# Altium PCB #S and 6s.PcbDoc
Units mil, origin at the board's own origin, x right, y up, seen from the top; angles counter-clockwise.
Board outline 3935 x 7680 mil, 2 copper layers (Top Layer, Bottom Layer); 64 components, 33 nets, 158 pads, 6 vias.
Unrouted connection lines stored in the file: 46.
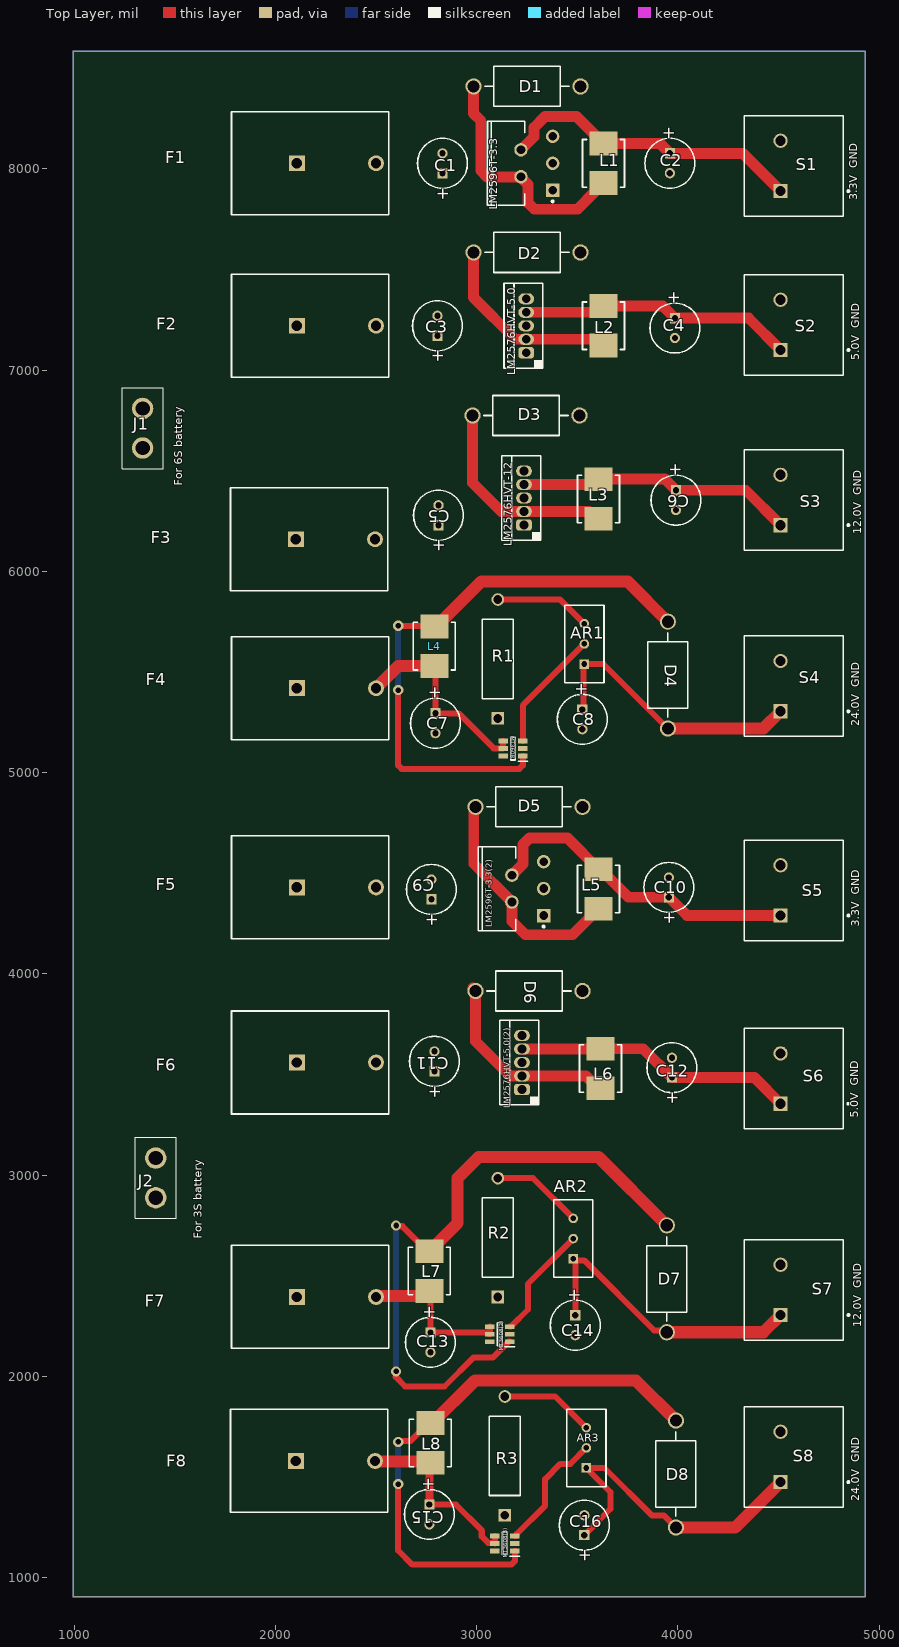
[diagram p0: Top Layer view]
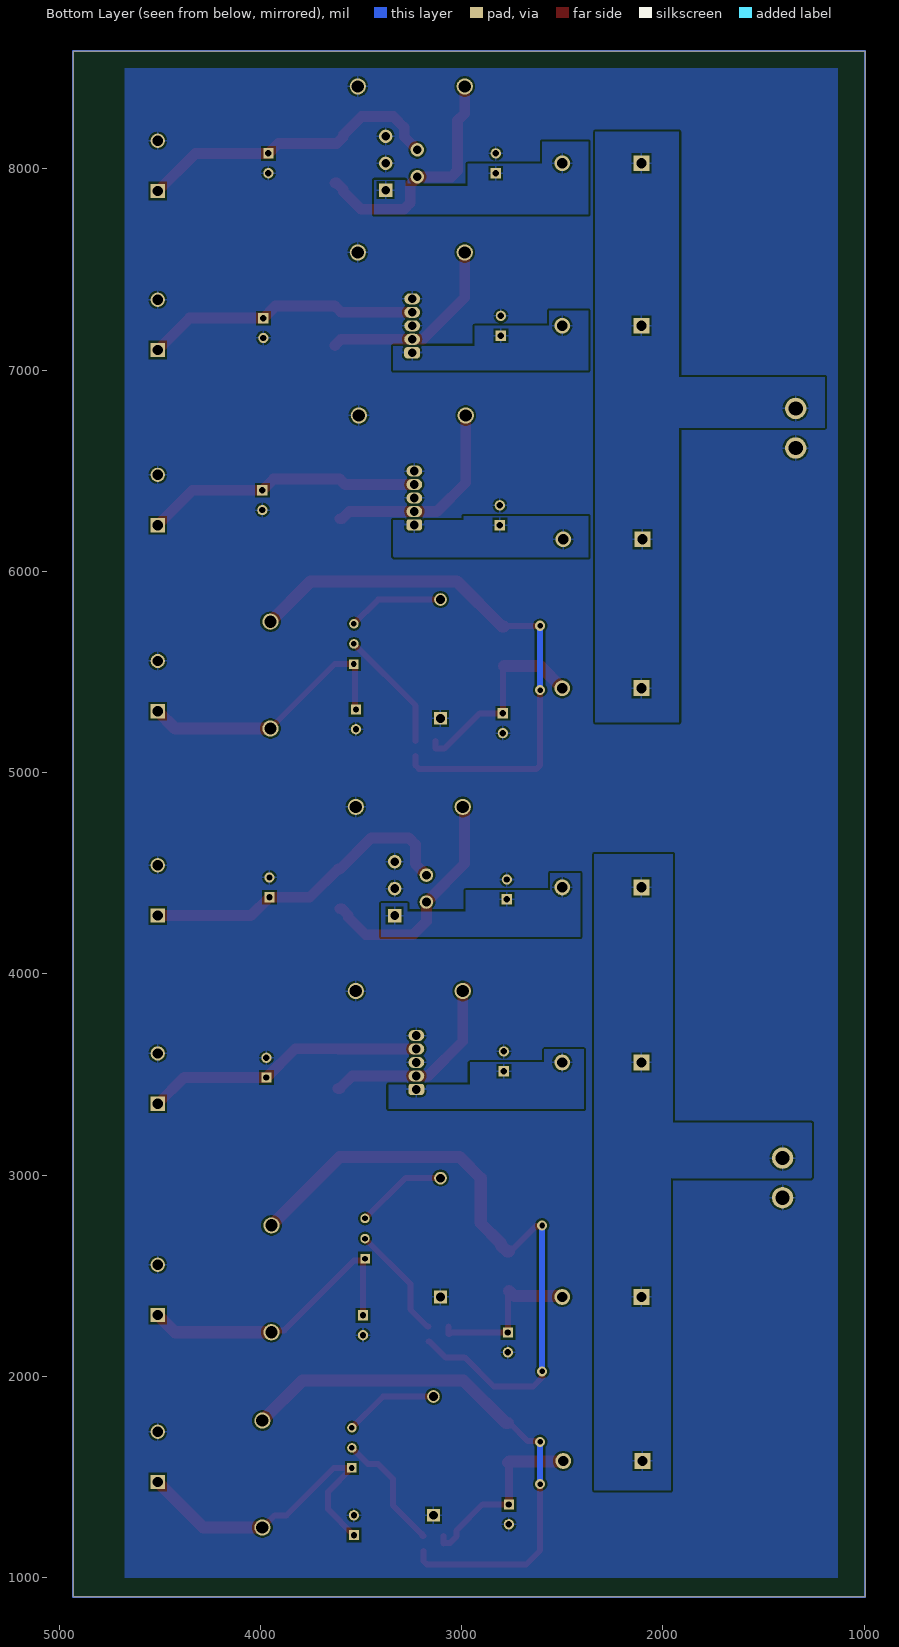
[diagram p1: Bottom Layer view, seen from below]
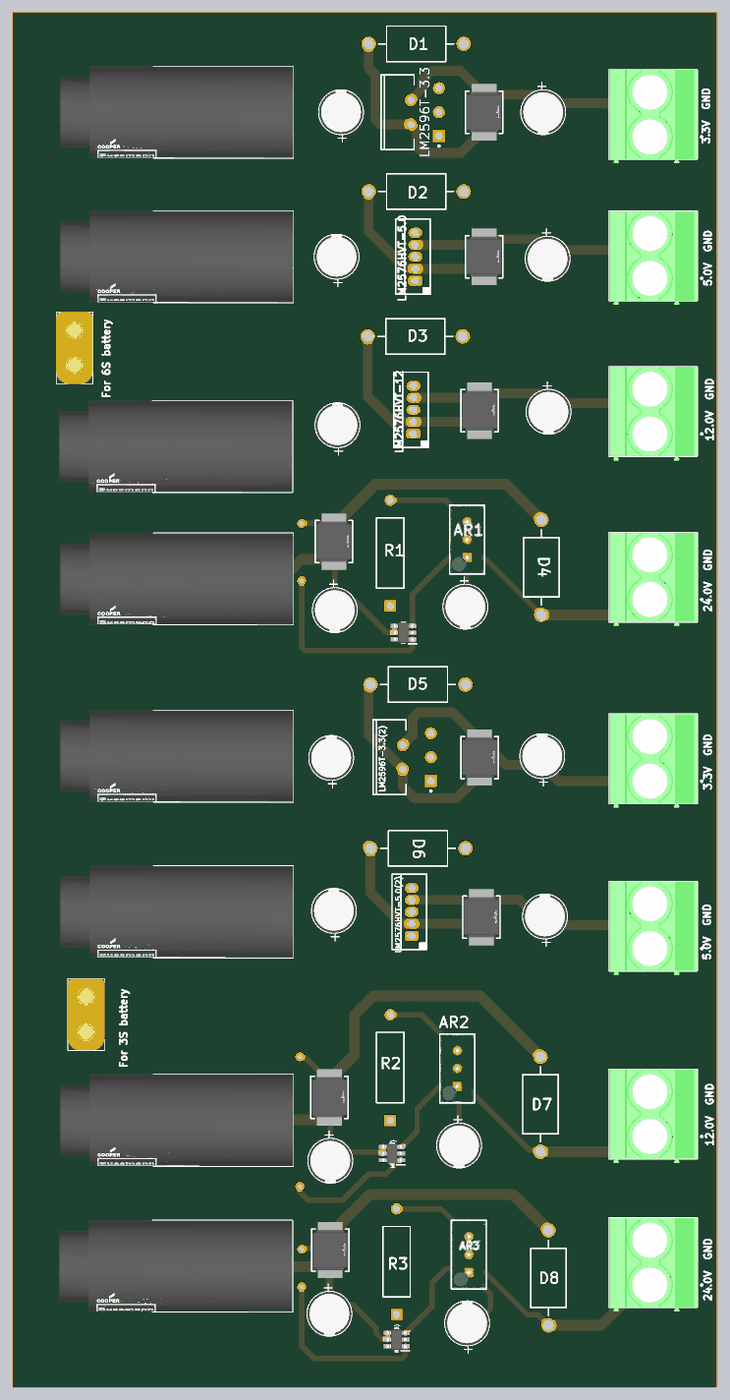
[diagram p2: 3D render of the assembled board from above, using the file's embedded part models]

## Layer stack, top to bottom
Top Solder: solder mask 0.4, Solder Resist, Dk 3.5
Top Layer: signal copper 1.4
Dielectric 1: dielectric 12.6, FR-4, Dk 4.8
Bottom Layer: signal copper 1.4
Bottom Solder: solder mask 0.4, Solder Resist, Dk 3.5

## Board outline
995,905 995,8585 4930,8585 4930,905

## Design rules (kind name [scope] priority, off if disabled: settings)
Clearance Clearance_13 [All] p1: gap=10 ignorepadtopadclearanceinfootprint=FALSE except(0: Arc-Hole Track-Hole SMDPad-Hole THPad-Hole Via-Hole Fill-Hole Poly-Hole Region-Hole Text-Hole)
Clearance Clearance_12 [All] p2: gap=10 ignorepadtopadclearanceinfootprint=FALSE except(0: Arc-Hole Track-Hole SMDPad-Hole THPad-Hole Via-Hole Fill-Hole Poly-Hole Region-Hole Text-Hole)
Clearance Clearance_11 [All] p3: gap=10 ignorepadtopadclearanceinfootprint=FALSE except(0: Arc-Hole Track-Hole SMDPad-Hole THPad-Hole Via-Hole Fill-Hole Poly-Hole Region-Hole Text-Hole)
Clearance Clearance_10 [All] p4: gap=10 ignorepadtopadclearanceinfootprint=FALSE except(0: Arc-Hole Track-Hole SMDPad-Hole THPad-Hole Via-Hole Fill-Hole Poly-Hole Region-Hole Text-Hole)
Clearance Clearance_9 [All] p5: gap=10 ignorepadtopadclearanceinfootprint=FALSE except(0: Arc-Hole Track-Hole SMDPad-Hole THPad-Hole Via-Hole Fill-Hole Poly-Hole Region-Hole Text-Hole)
Clearance Clearance_8 [All] p6: gap=10 ignorepadtopadclearanceinfootprint=FALSE except(0: Arc-Hole Track-Hole SMDPad-Hole THPad-Hole Via-Hole Fill-Hole Poly-Hole Region-Hole Text-Hole)
Clearance Clearance_7 [All] p7: gap=10 ignorepadtopadclearanceinfootprint=FALSE except(0: Arc-Hole Track-Hole SMDPad-Hole THPad-Hole Via-Hole Fill-Hole Poly-Hole Region-Hole Text-Hole)
Clearance Clearance_6 [All] p8: gap=10 ignorepadtopadclearanceinfootprint=FALSE except(0: Arc-Hole Track-Hole SMDPad-Hole THPad-Hole Via-Hole Fill-Hole Poly-Hole Region-Hole Text-Hole)
Clearance Clearance_5 [All] p9: gap=1 ignorepadtopadclearanceinfootprint=FALSE
Clearance Clearance_4 [All] p10: gap=1 ignorepadtopadclearanceinfootprint=FALSE
Clearance Clearance_3 [All] p11: gap=1 ignorepadtopadclearanceinfootprint=FALSE
Clearance Clearance_2 [All] p12: gap=1 ignorepadtopadclearanceinfootprint=FALSE
Clearance Clearance_1 [All] p13: gap=1 ignorepadtopadclearanceinfootprint=FALSE
Clearance [All] p14: gap=1 ignorepadtopadclearanceinfootprint=FALSE
PolygonConnect [All] p1: connectstyle=Relief reliefconductorwidth=10 reliefentries=4 polygonreliefangle="90 Angle" airgapwidth=10
RoutingVias [All] p1: holewidth=28 width=50 viastyle="Through Hole" minholewidth=28 minwidth=50 maxholewidth=28 maxwidth=50
SolderMaskExpansion [All] p1: expansion=4 istentingtop=FALSE
Width [All] p1: maxlimit=60 minlimit=25 preferedwidth=54
30 further rules are at their usual default settings.

## Components (designator, comment, footprint, x,y, rotation, side; value= is the part's Value field where it differs from the comment)
AR1 "3296W-1-501LF" FP-3296W-MFG 3534.8,5640 r0 top
AR2 "3296W-1-501LF" FP-3296W-MFG 3479.8,2685 r0 top
AR3 "3296W-1-501LF" FP-3296W-MFG 3544.8,1645 r0 top
C1 "ECA-2AM220" CAPPR55-250-1120X630X1220 2830,8028.07 r90 top
C2 "ECA-2AM220" CAPPR55-250-1120X630X1220 3960,8028.07 r270 top
C3 "ECA-2AM220" CAPPR55-250-1120X630X1220 2805,7220.75 r90 top
C4 "ECA-2AM220" CAPPR55-250-1120X630X1220 3985,7209.21 r270 top
C5 "ECA-2AM220" CAPPR55-250-1120X630X1220 2810,6279.21 r90 top
C6 "ECA-2AM220" CAPPR55-250-1120X630X1220 3990,6354.21 r270 top
C7 "ECA-2AM220" CAPPR55-250-1120X630X1220 2795,5245.79 r270 top
C8 "ECA-2AM220" CAPPR55-250-1120X630X1220 3525,5265 r270 top
C9 "ECA-2AM220" CAPPR55-250-1120X630X1220 2775,4420 r90 top
C10 "ECA-2AM220" CAPPR55-250-1120X630X1220 3955,4430 r90 top
C11 "ECA-2AM220" CAPPR55-250-1120X630X1220 2790,3565.79 r90 top
C12 "ECA-2AM220" CAPPR55-250-1120X630X1220 3970,3534.21 r90 top
C13 "ECA-2AM220" CAPPR55-250-1120X630X1220 2770,2169.21 r270 top
C14 "ECA-2AM220" CAPPR55-250-1120X630X1220 3490,2254.21 r270 top
C15 "ECA-2AM220" CAPPR55-250-1120X630X1220 2765,1314.21 r270 top
C16 "ECA-2AM220" CAPPR55-250-1120X630X1220 3535,1260.79 r90 top
D1 "1N5822" ONSC-AXIAL_LEAD-2-267-05_V 3250,8410 r0 top
D2 "1N5822" ONSC-AXIAL_LEAD-2-267-05_V 3250,7585 r0 top
D3 "1N5822" ONSC-AXIAL_LEAD-2-267-05_V 3245,6775 r0 top
D4 "1N5822" ONSC-AXIAL_LEAD-2-267-05_V 3950,5485 r90 top
D5 "1N5822" ONSC-AXIAL_LEAD-2-267-05_V 3260,4830 r0 top
D6 "1N5822" ONSC-AXIAL_LEAD-2-267-05_V 3260,3915 r0 top
D7 "1N5822" ONSC-AXIAL_LEAD-2-267-05_V 3945,2485 r90 top
D8 "1N5822" ONSC-AXIAL_LEAD-2-267-05_V 3990,1515 r90 top
F1 "BK/HTC-50M" FP-BK-HTC-50M-MFG 1911.42,8028.07 r0 top
F2 "BK/HTC-50M" FP-BK-HTC-50M-MFG 1911.42,7220.75 r0 top
F3 "BK/HTC-50M" FP-BK-HTC-50M-MFG 1906.42,6160 r0 top
F4 "BK/HTC-50M" FP-BK-HTC-50M-MFG 1911.42,5420 r0 top
F5 "BK/HTC-50M" FP-BK-HTC-50M-MFG 1911.42,4430 r0 top
F6 "BK/HTC-50M" FP-BK-HTC-50M-MFG 1911.42,3560 r0 top
F7 "BK/HTC-50M" FP-BK-HTC-50M-MFG 1911.42,2395 r0 top
F8 "BK/HTC-50M" FP-BK-HTC-50M-MFG 1906.42,1580 r0 top
J1 "XT30PB" XT30PB 1340,6810 r0 top
J2 "XT30PB" XT30PB 1405,3085 r0 top
L1 "LQH55DN221M03L" FP-LQH55DN_03-MFG 3630,8028.07 r90 top
L2 "LQH55DN221M03L" FP-LQH55DN_03-MFG 3630,7220.75 r90 top
L3 "LQH55DN221M03L" FP-LQH55DN_03-MFG 3605,6360 r90 top
L4 "LQH55DN221M03L" FP-LQH55DN_03-MFG 2790,5628.43 r90 top
L5 "LQH55DN221M03L" FP-LQH55DN_03-MFG 3605,4422.13 r90 top
L6 "LQH55DN221M03L" FP-LQH55DN_03-MFG 3615,3530 r90 top
L7 "LQH55DN221M03L" FP-LQH55DN_03-MFG 2765,2523.43 r90 top
L8 "LQH55DN221M03L" FP-LQH55DN_03-MFG 2770,1670 r90 top
LM2576HVT-5.0 "LM2576HVT-5.0/NOPB" KC0005A 3245.82,7220.55 r180 top
LM2576HVT-5.0(2) "LM2576HVT-5.0/NOPB" KC0005A 3225,3560 r180 top
LM2576HVT-12 "LM2576HVT-12/NOPB" KC0005A 3235,6365 r180 top
LM2596T-3.3 "LM2596T-3.3/NOPB" NDH0005A 3298.74,8028.07 r90 top
LM2596T-3.3(2) "LM2596T-3.3/NOPB" NDH0005A 3253.74,4424.09 r90 top
MT3608 "MT360" SOT95P280X145-6N 3180,5120 r180 top
MT3608(2) "MT360" SOT95P280X145-6N 3115,2210 r180 top
MT3608(3) "MT360" SOT95P280X145-6N 3140,1170 r180 top
R1 "PR02000206202JA100" VISH-A1-2_V2 3105,5565 r90 top
R2 "PR02000206202JA100" VISH-A1-2_V2 3105,2690 r90 top
R3 "PR02000206202JA100" VISH-A1-2_V2 3140,1605 r90 top
S1 "1714955" PHOE-1714955_V 4510,8015 r90 top
S2 "1714955" PHOE-1714955_V 4510,7225 r90 top
S3 "1714955" PHOE-1714955_V 4510,6355 r90 top
S4 "1714955" PHOE-1714955_V 4510,5430 r90 top
S5 "1714955" PHOE-1714955_V 4510,4415 r90 top
S6 "1714955" PHOE-1714955_V 4510,3480 r90 top
S7 "1714955" PHOE-1714955_V 4510,2430 r90 top
S8 "1714955" PHOE-1714955_V 4510,1600 r90 top

## Footprints (in the part's own frame and the unit in brackets; to place one, negate y for a bottom-side part, rotate by r counter-clockwise, add the part's x,y. Pads: shape width x height; smd on the part's side, far side on the other; paste and mask are expansions set on the pad)
CAPPR55-250-1120X630X1220 [mm] "THD, 2-Leads, Dia 6.3mm, Body Length 11.2mm"
  rect 1.3x1.3 hole 0.8: 1(-1.25,0)
  round 1.3 hole 0.8: 2(1.25,0)
  silkscreen extent -3.15,-3.15 3.15,3.15, body extent -3.15,-3.15 3.16,3.15, height 12.21
FP-3296W-MFG [mm]
  rect 1.2x1.2 hole 0.7 paste-1000 mask+0: 1(0.005,-2.54)
  round 1.2 hole 0.7 paste-1000 mask+0: 2(0.005,0) 3(0.005,2.54)
  silkscreen extent -2.48,-4.89 2.48,4.89, body extent -2.58,-4.99 2.58,4.99, height 0.25
FP-BK-HTC-50M-MFG [mm]
  rect 2x2 hole 1.3 paste-1000 mask+0: 1(4.95,0)
  round 2 hole 1.3 paste-1000 mask+0: 2(14.95,0)
  silkscreen extent -3.3,-6.5 16.55,6.5, body extent -16.65,-6.6 16.65,6.6, height 0.25
FP-LQH55DN_03-MFG [mm]
  rect 3x3.5 smd paste+0 mask+0: 1(-2.5,0) 2(2.5,0)
  silkscreen extent -3,-2.65 3,2.65, body extent -4.1,-2.75 4.1,2.75, height 0.25
KC0005A [mm] "FM, 5-Leads, Body 10.16x8.46mm, Pitch 1.7mm"
  rrect50% 2x1.4 hole 1.1: 1(0,3.4)
  oval 2x1.4 hole 1.1: 2(0,1.7) 3(0,0) 4(0,-1.7) 5(0,-3.4)
  silkscreen extent -2.13,-5.35 2.8,5.35, body extent -2.08,-5.35 2.77,5.35, height 16.51
NDH0005A [mm] "FM, 5-Leads, Body 10.6x4.7mm, Pitch 1.7mm"
  rect 1.7x1.7 hole 1.1: 1(-3.4,-2)
  round 1.7 hole 1.1: 2(-1.7,2) 3(0,-2) 4(1.7,2) 5(3.4,-2)
  silkscreen extent -5.3,-2.13 5.3,6.23, body extent -5.35,-2.31 5.35,6.28, height 21.1
ONSC-AXIAL_LEAD-2-267-05_V [mm] "AXIAL, 2-Leads, Diameter 5.05mm"
  round 2.05 hole 1.55: 1(-6.745,0) 2(6.745,0)
  silkscreen extent -5.32,-2.52 5.32,2.52
PHOE-1714955_V [mm] "Terminal Block, 2-Leads, Body 12.7x12.5mm, Pitch 6.35mm"
  rect 1.8x1.8 hole 1.3: 1(-3.175,0)
  round 1.8 hole 1.3: 2(3.175,0)
  silkscreen extent -6.35,-8.68 6.35,4.6, body extent -6.92,-7.9 6.35,4.6, height 21.51
SOT95P280X145-6N [mm]
  rect 1.2x0.6 smd: 1(-1.25,0.95) 2(-1.25,0) 3(-1.25,-0.95) 4(1.25,-0.95) 5(1.25,0) 6(1.25,0.95)
  silkscreen extent -1.85,-1.45 0.3,1.6, body extent -1.4,-1.45 1.4,1.45, height 1.45
VISH-A1-2_V2 [mm] "Through Hole, 2-Leads, Dia 3.9mm, Body Length 10mm, Pin Spacing 15mm"
  rect 1.6x1.6 hole 1.1: 1(-7.5,0)
  round 1.6 hole 1.1: 2(7.5,0)
  silkscreen extent -5,-1.95 5,1.95, body extent -7.91,-1.95 7.92,1.95, height 3.88
XT30PB [mm]
  round 2.7 hole 1.8: 1(0,0) 2(0,-5)
  silkscreen extent -2.6,-7.6 2.6,2.6, body extent -2.6,-7.6 2.6,2.6, height 10.66

## Part data
AR1 AR2 AR3: library part CMP-07234-000046-1, "TRIMMER 500 OHM 0.5W PC PIN TOP", Color=Blue, Max Operating Temperature=125°C, Max Power Dissipation=500mW, Min Operating Temperature=-55°C, Package Quantity=50, Resistance=500R, Resistance Tolerance=10%, Resistor Type=Cermet, Temperature Coefficient=100ppm/°C, Contact Plating=Tin, Depth=4.83mm, Height=0.395inch, Lead Free="Lead Free", Length=9.53mm, Military Standard=Not, Mount="Through Hole", Number of Turns=25, Packaging=Rail/Tube, Power Rating=500mW, Radiation Hardening=No, REACH SVHC="No SVHC", RoHS Compliant=Yes, Series=3296, Taper=Linear, Technology=CERMET, Termination=Pin, Tolerance=10%, Weight=0.03oz, Width=9.53mm
C1 C2 C3 C4 C5 C6 C7 C8 C9 C10 C11 C12 C13 C14 C15 C16: library part CMP-1665-00035-2, "Aluminum Electrolytic Capacitor, 22 uF, +/- 20%, 100 V, -40 to 85 degC, 2-Pin THD, RoHS, Bulk", Case Code (Imperial)=0603, Case Code (Metric)=1608, Colour=Orange, Forward Current="20 mA", Forward Voltage="2.1 V", Max Operating Temperature="85 degC", Min Operating Temperature="-55 degC", Package Quantity=3000, Case\Package=0603, ComponentLink1Description="Manufacturer URL", ComponentLink1URL=http://www.panasonic.com/, ComponentLink2Description=Datasheet, ComponentLink2URL=https://industrial.panasonic.com/cdbs/www-data/pdf/RDF0000/ABA0000C1047.pdf, DatasheetVersion=Mar-16, Height="1.1 mm", Illumination Colour=Orange, Length="1.6 mm", Lens Style=Clear, Luminous Intensity="2 mcd", Mount="Surface Mount", Nominal Vf="2.1 V", PackageDescription="2-Pin Through Hole Device, Dia 6.3 mm, Body Length 11.2 mm", PackageReference=Radial, Packaging="Tape and Reel", Pins=2, Radiation Hardening=No, RoHSCompliant=true, Viewing Angle="130 degrees", Width="0.8 mm"
D1 D2 D3 D4 D5 D6 D7 D8: library part CMP-1055-00007-1, "Rectifier, 2-Pin Axial_Lead, Bulk Bag", Manufacturer="On Semiconductor", ComponentLink1Description="Manufacturer URL", ComponentLink1URL=http://www.onsemi.com/, ComponentLink2Description=Datasheet, ComponentLink2URL=http://www.onsemi.cn/pub_link/Collateral/1N5820-D.PDF, ComponentLink3Description="Package Specification", ComponentLink3URL=http://www.onsemi.com/pub_link/Collateral/267-05.PDF, Configuration=Single, DatasheetVersion="Rev. 10", IFSM Max (A)=80, Mounting Technology="Through Hole", Note1=0, PackageDescription="2-Pin, Axial Lead, Diameter 5.05 mm", PackageReference=AXIAL_LEAD-2-267-05, PackageVersion="Rev. G, 06/2000", Packing="Bulk Bag", PartNumber=1N5822, RoHS=FALSE
F1 F2 F3 F4 F5 F6 F7 F8: library part CMP-31518-000002-1, "FUSE HOLDER CART 250V 6.3A PCB", Fuse Current=10A, Manufacturer="Cooper Bussmann", Package=0, Temperature="-30°C to +85°C", Temperature Range High=+85°C, Temperature Range Low=-30°C, Automotive=No, Category=Fuse, ComponentLink2Description=Datasheet, ComponentLink2URL=https://media.digikey.com/pdf/Data%20Sheets/Cooper%20Bussmann%20PDFs/HTC_Series_Rev_Dec_2017.pdf, Conn Orientation="Right Angle", Device Class L1="Circuit Protection", Device Class L2="Fuse Holders", Device Class L3=unset, Digikey Description="FUSE HOLDER CART 250V 6.3A PCB", Height=11.7mm, Lead Free=Yes, Manufacturer Part Number=BK/HTC-50M, Mouser Description="Fuse Holder Panel Mount", Number Of Fuses=1, Octopart=https://octopart.com/bk%2Fhtc-50m-cooper+bussmann-12077396, RoHS=TRUE
J1 J2: "Connector", Manufacturer_Name=Amass, Datasheet Link=https://www.tme.eu/Document/4acc913878197f8c2e30d4b8cdc47230/XT30UPB%20SPEC.pdf, Height=10.7mm, Manufacturer_Part_Number=XT30PB
L1 L2 L3 L4 L5 L6 L7 L8: library part CMP-06042-002541-1, "Wire Wound Ferrite Inductor for Power Lines 220μH ±20% 3.36Ω  0.32A 2220", Case Code (Imperial)=2220, Case Code (Metric)=5750, Current Rating=320mA, DC Resistance (DCR)=2.4R, Inductance=220uH, Inductance Tolerance=20%, Max Operating Temperature=80°C, Min Operating Temperature=-40°C, Package Quantity=350, Resistor Type=Wirewound, Self Resonant Frequency=4MHz, Test Frequency=100kHz, Case/Package=2220, Core Material=Ferrite, DC Current=320mA, Depth=5.3mm, Height=4.7mm, Height - Seated (Max)=0.198inch, Lead Free="Lead Free", Length=5.7mm, Max DC Current=320mA, Military Standard=Not, Mount="Surface Mount", Packaging="Tape and Reel", Radiation Hardening=No, REACH SVHC="No SVHC", Series Resistance=2.4R, Shielding=Unshielded, Termination=SMD/SMT, Tolerance=20%, Weight=0.016932oz, Width=0.197inch
LM2576HVT-5.0 LM2576HVT-5.0(2): library part CMP-0069-01992-3, "SIMPLE SWITCHER® 3A Step-Down Voltage Regulator, 5-pin TO-220, Pb-Free", Manufacturer="Texas Instruments", PackageTopMarking="NSUZXYTTE#*LM2576HVT*-5.0 P+", PowerWise=N, Code_JEDEC=TO-220-AB, ComponentLink1Description="Datasheet URL", ComponentLink1URL=http://www.ti.com/general/docs/lit/getliterature.tsp?genericPartNumber=LM2576HV&fileType=pdf, CompType=Switcher, PackageDescription="TO-220, Molded, 5 Lead, Straight", PackageReference=KC0005A, PinCount=5, RoHS=Y
LM2576HVT-12: library part CMP-0069-02021-3, "SIMPLE SWITCHER® 3A Step-Down Voltage Regulator, 5-pin TO-220, Pb-Free", Manufacturer="Texas Instruments", PackageTopMarking="NSUZXYTTE#*LM2576HVT*-12 P+", PowerWise=N, Code_JEDEC=TO-220-AB, ComponentLink1Description="Datasheet URL", ComponentLink1URL=http://www.ti.com/general/docs/lit/getliterature.tsp?genericPartNumber=LM2576HV&fileType=pdf, CompType=Switcher, PackageDescription="TO-220, Molded, 5 Lead, Straight", PackageReference=KC0005A, PinCount=5, RoHS=Y
LM2596T-3.3 LM2596T-3.3(2): library part CMP-0069-01930-3, "SIMPLE SWITCHER® Power Converter 150 KHz 3A Step-Down Voltage Regulator, 5-pin TO-220, Pb-Free", Manufacturer="Texas Instruments", PackageTopMarking="NSUZXYTTE#*LM2596T*-3.3 P+", PowerWise=N, ComponentLink1Description="Datasheet URL", ComponentLink1URL=http://www.ti.com/general/docs/lit/getliterature.tsp?genericPartNumber=LM2596&fileType=pdf, CompType=Switcher, PackageDescription="TO-220, Molded, Stagger Bend, 5 Lead", PackageReference=NDH0005A, PinCount=5, RoHS=Y
MT3608 MT3608(2) MT3608(3): library part MT3608, "Undefined or Miscellaneous", Manufacturer_Name=Aerosemi, Datasheet Link=https://www.olimex.com/Products/Breadboarding/BB-PWR-3608/resources/MT3608.pdf, Height=1.45mm, Manufacturer_Part_Number=MT3608
R1 R2 R3: library part CMP-1240-00001-1, "Power Metal Film Leaded Resistor, 62 KOhm +/-5%, 2 W, 2-Pin THD, RoHS, Ammo Pack", Manufacturer="Vishay Semiconductor", Power="2 W", Resistance="62 KOhm", Temperature Coefficient="+/-250 ppm/degC", Tolerance=+/-5%, ComponentLink1Description="Manufacturer URL", ComponentLink1URL=http://www.vishay.com/, ComponentLink2Description=Datasheet, ComponentLink2URL=http://www.vishay.com/docs/28729/28729.pdf, ComponentLink3Description="Package Specification", ComponentLink3URL=http://www.vishay.com/docs/28729/28729.pdf, DatasheetVersion=Jun-13, Mounting Technology="Through Hole", PackageDescription="2-Pin Axial Lead, Body 10 x 3.9 mm", Packing="Ammo Pack", PartNumber=PR02000206202JA100, RoHS=TRUE
S1 S2 S3 S4 S5 S6 S7 S8: library part CMP-2000-05797-1, "PC Terminal Block, Pitch 6.35 mm, 1 x 2 Position, Height 21.5 mm, Tail Lenght 5.1 mm, RoHS, Bulk", Manufacturer="Phoenix Contact", Package Description="PC Terminal Block, Pitch 6.35 mm, 1 x 2 Position, Height 21.5 mm, Tail Lenght 5.1 mm", Datasheet URL=http://media.digikey.com/pdf/Data%20Sheets/Phoenix%20Contact%20PDFs/1714955.pdf, Datasheet Version=02/2010, Manufacturer URL=http://www.phoenixcontact.com/, Mounting Technology=ThroughHole, Package Reference=1714955

## Via types
v1: diameter 50, hole 28, Top Layer to Bottom Layer, 6 vias

## Nets (pads, with @x,y where several pads share a name; then routed paths per layer and width w, separated by ;. In a path a pad name is that pad's centre, name@x,y a point inside that pad or via, vN(x,y) a via of type N, cw(c..) or ccw(c..) an arc to the next point about the centre after c; other vN are vias at no path point)
+11.1: F5.1 F6.1 F7.1 F8.1 J2.1
+22.2: F1.1 F2.1 F3.1 F4.1 J1.1
FB: AR1.2 MT3608.3 | length 609.3
  Top Layer w30: MT3608.3 3229.21,5334.21 AR1.2
FB(2): AR2.2 MT3608(2).3 | length 571.6
  Top Layer w30: 3164.21,2247.4 3169.65,2247.4 3255,2332.76 3255,2460 AR2.2
FB(3): AR3.2 MT3608(3).3 | length 617.4
  Top Layer w30: 3189.21,1207.4 3194.65,1207.4 3197.83,1210.59 3197.83,1216.02 3340,1358.19 3340,1490 3415.85,1565.85 3465.85,1565.85 AR3.2
GND: C1.2 C2.2 C3.2 C4.2 C5.2 C6.2 C7.2 C8.2 C9.2 C10.2 C11.2 C12.2 C13.2 C14.2 C15.2 C16.2 D1.2 D2.2 D3.2 D5.2 D6.2 J1.2 J2.2 LM2576HVT-5.0(2).3 LM2576HVT-5.0(2).5 LM2576HVT-5.0.3 LM2576HVT-5.0.5 LM2576HVT-12.3 LM2576HVT-12.5 LM2596T-3.3(2).3 LM2596T-3.3(2).5 LM2596T-3.3.3 LM2596T-3.3.5 MT3608(2).2 MT3608(3).2 MT3608.2 R1.1 R2.1 R3.1 S1.2 S2.2 S3.2 S4.2 S5.2 S6.2 S7.2 S8.2
NetAR1_3: AR1.3 R1.2 | length 479.8
  Top Layer w30: R1.2 3414.72,5860.28 AR1.3
NetAR2_3: AR2.3 R2.2 | length 458
  Top Layer w30: R2.2 3279.72,2985.28 AR2.3
NetAR3_3: AR3.3 R3.2 | length 469.3
  Top Layer w30: R3.2 3389.72,1900.28 AR3.3
NetC1_1: C1.1 F1.2 LM2596T-3.3.1
NetC3_1: C3.1 F2.2 LM2576HVT-5.0.1
NetC5_1: C5.1 F3.2 LM2576HVT-12.1
NetC7_1: C7.1 F4.2 L4.1 MT3608.4 MT3608.5 | length 1018.3
  Top Layer w30: L4.1 2795,5525 C7.1 2910,5295 3084.41,5120.59 3130.2,5120.59 MT3608.5 MT3608.4
  Top Layer w60: F4.2 2610,5530 L4.1
NetC9_1: C9.1 F5.2 LM2596T-3.3(2).1
NetC11_1: C11.1 F6.2 LM2576HVT-5.0(2).1
NetC13_1: C13.1 F7.2 L7.1 MT3608(2).4 MT3608(2).5 | length 829.8
  Top Layer w30: L7.1 2770,2420 C13.1 3051.93,2218.43 3060.35,2210 3065.79,2210 3065.79,2247.4
  Top Layer w60: F7.2 2505,2390 2505,2394.93 2508.66,2398.59 2738.59,2398.59 L7.1
NetC15_1: C15.1 F8.2 L8.1 MT3608(3).4 MT3608(3).5 | length 948.7
  Top Layer w30: C15.1 2896.57,1363.43 3025,1235 3025,1205 3056.81,1173.19 3087.6,1173.19 3089.19,1171.59 ; 3090.79,1170 3089.19,1171.59 ; 3090.79,1207.4 3090.79,1173.19 3089.19,1171.59
  Top Layer w40: C15.1 2765,1566.57 L8.1
  Top Layer w60: F8.2 2498.59,1576.41 2765.16,1576.41 L8.1
NetD1_1: D1.1 L1.1 LM2596T-3.3.2 | length 1238.2
  Top Layer w54: D1.1 2984.45,8275.55 3020,8240 3020,7991.63 3051.63,7960 3218.86,7960 LM2596T-3.3.2 3220,7958.04 3255,7923.04 3255,7831.63 3286.63,7800 3500.35,7800 3588.1,7887.75 3588.1,7897.59 3620.16,7929.65 L1.1
NetD2_1: D2.1 L2.1 LM2576HVT-5.0.2 | length 968.7
  Top Layer w54: D2.1 2984.45,7360.55 3191.17,7153.83 3245.61,7153.83 LM2576HVT-5.0.2 3246.03,7153.41 3598.91,7153.41 L2.1
NetD3_1: D3.1 L3.1 LM2576HVT-12.2 | length 1034.1
  Top Layer w54: D3.1 2979.45,6440.55 3121.93,6298.07 LM2576HVT-12.2 3558.66,6298.07 3595.16,6261.57 L3.1
NetD4_2: D4.2 L4.2 MT3608.1 | length 2889.1
  Top Layer w30: v1(2610,5410) 2610,5036.79 2627.57,5019.21 3211.64,5019.21 3229.21,5036.79 MT3608.1 ; v1(2610,5730) 2786.85,5730 L4.2
  Top Layer w60: L4.2 2799.84,5726.85 3022.99,5950 3750.55,5950 D4.2
  Bottom Layer w30: v1(2610,5410) v1(2610,5730)
NetD5_1: D5.1 L5.1 LM2596T-3.3(2).2 | length 1167.7
  Top Layer w54: D5.1 2989.34,4824.89 2989.34,4806 2985,4801.67 2985,4547.17 3175,4357.17 3175,4261.63 3241.63,4195 3476.3,4195 3563.1,4281.8 3563.1,4291.65 3595.16,4323.7 L5.1
NetD6_1: D6.1 L6.1 LM2576HVT-5.0(2).2 | length 973.2
  Top Layer w54: D6.1@2980,3930 D6.1@2984.45,3925.55 ; D6.1 2994.45,3665.55 3166.72,3493.28 3224.79,3493.28 3225,3493.07 3543.66,3493.07 3605.16,3431.57 L6.1
NetD7_2: D7.2 L7.2 MT3608(2).1 | length 3272.8
  Top Layer w30: 2597.43,1997.57 2645,1950 2840,1950 2985,2095 3081.18,2095 3158.78,2172.6 3164.21,2172.6 ; v1(2600,2750) 2603.83,2746.17 2630.83,2746.17 2755.16,2621.85 L7.2
  Top Layer w60: L7.2 2774.84,2621.85 2803.9,2650.91 2803.9,2660.75 2905,2761.85 2905,2985 3010,3090 3605.55,3090 D7.2
  Bottom Layer w30: v1(2600,2025) v1(2600,2750)
NetD8_2: D8.2 L8.2 MT3608(3).1 | length 2794.5
  Top Layer w30: v1(2610,1465) 2610,1135 2680,1065 3171.64,1065 3189.21,1082.57 3189.21,1132.6 ; v1(2610,1675) 2613.83,1678.83 2670.56,1678.83 2760.16,1768.43 L8.2
  Top Layer w60: L8.2 2779.84,1768.43 2991.42,1980 3790.55,1980 D8.2
  Bottom Layer w30: v1(2610,1465) v1(2610,1675)
VOUT1: C2.1 L1.2 LM2596T-3.3.4 S1.1 | length 1543.7
  Top Layer w54: LM2596T-3.3.4 3285,8160 3285,8205 3340,8260 3496.5,8260 3588.1,8168.39 3588.1,8158.55 3620.16,8126.5 3910.79,8126.5 C2.1 4322.72,8077.28 S1.1
VOUT2: C4.1 L2.2 LM2576HVT-5.0.4 S2.1 | length 1368.1
  Top Layer w54: LM2576HVT-5.0.4 3246.03,7287.69 3598.52,7287.69 L2.2 3924.25,7319.17 C4.1 4351.57,7258.43 S2.1
VOUT3: C6.1 L3.2 LM2576HVT-12.4 S3.1 | length 1380.6
  Top Layer w54: LM2576HVT-12.4 3235.21,6432.14 3578.72,6432.14 L3.2 3935,6458.43 C6.1 4336.57,6403.43 S3.1
VOUT4: AR1.1 C8.1 D4.1 S4.1 | length 1373.1
  Top Layer w30: C8.1 3530,5319.21 3530,5535 AR1.1 3629.45,5540 D4.1
  Top Layer w60: D4.1 4424.45,5219.45 S4.1
VOUT5: C10.1 L5.2 LM2596T-3.3(2).4 S5.1 | length 1627.7
  Top Layer w54: 3175,4491.02 3230,4546.02 3230,4643.37 3261.63,4675 3450.55,4675 L5.2 3614.84,4520.55 3754.61,4380.79 C10.1 4045.79,4290 S5.1
VOUT6: C12.1 L6.2 LM2576HVT-5.0(2).4 S6.1 | length 1398.9
  Top Layer w54: 3225,3626.93 3225.21,3627.14 3613.72,3627.14 L6.2 3826.57,3628.43 C12.1 4380,3485 S6.1
VOUT7: AR2.1 C14.1 D7.1 S7.1 | length 1502.6
  Top Layer w30: C14.1 3490,2575 AR2.1 3488.62,2576.38 3533.62,2576.38 3880.85,2229.15 3935.3,2229.15 D7.1
  Top Layer w60: D7.1 4424.45,2219.45 S7.1
VOUT8: AR3.1 C16.1 D8.1 S8.1 | length 1617.8
  Top Layer w30: C16.1 3665,1341.57 3665,1425 AR3.1 3635,1545 3870,1310 3929.45,1310 D8.1
  Top Layer w60: D8.1 4284.45,1249.45 S8.1
pads on no net: MT3608(2).6 MT3608(3).6 MT3608.6
copper on no net: | length 23230
  Bottom Layer w10: 995,905 4930,905 4930,8585 995,8585 995,905

## Polygon pours and split planes (outlines as drawn)
GND on Bottom Layer "GND_L02_P015" (solid, pour order 15): 1130,8500 4675,8500 4675,999.72 1130,999.72
NetC5_1 on Bottom Layer "NETC5_1_L02_P013" (solid, pour order 13): 2370,6070 3335,6070 3340,6075 3340,6255 2990,6255 2990,6275 2370,6275
NetC9_1 on Bottom Layer "NETC9_1_L02_P011" (solid, pour order 11): 2560,4500 2410,4500 2410,4185 3400,4185 3400,4350 3275,4350 3270,4350 3270,4310 2980,4310 2980,4415 2560,4415
+11.1 on Bottom Layer "+11.1_L02_P008" (solid, pour order 8): 1950,4595 2340,4595 2340,4565 2340,1435 1960,1435 1960,2990 1955,2985 1265,2985 1260,2990 1260,3265 1265,3260 1950,3260
NetC11_1 on Bottom Layer "NETC11_1_L02_P006" (solid, pour order 6): 2588.23,3624.63 2588.23,3560 2958.23,3560 2958.23,3449.63 3268.23,3449.63 3363.23,3449.63 3363.23,3329.63 2393.23,3329.63 2393.23,3624.63
+22.2 on Bottom Layer "+22.2_L02_P003" (solid, pour order 3): 1195,6715 1195,6965 1920,6965 1920,8185 2335,8185 2335,5250 1920,5250 1920,6715
NetC3_1 on Bottom Layer "NETC3_1_L02_P001" (solid, pour order 1): 2565,7295 2565,7220 2935,7220 2935,7120 3245,7120 3340,7120 3340,7000 2370,7000 2370,7295
NetC1_1 on Bottom Layer "NETC1_1_L02_P000" (solid, pour order 0): 2410,8135 2420,8135 2600,8135 2600,8025 2970,8025 2970,7915 3280,7915 3280,7945 3435,7945 3435,7925 3435,7780 3435,7775 2370,7775 2370,8135

## Silkscreen, mask and mechanical layers (free items; w line width, h text height)
Top Overlay:
  text "3.3V  GND" at 4890,7845 h40 r90
  text "5.0V  GND" at 4900,7050 h40 r90
  text "For 6S battery" at 1536.67,6425 h40 r90
  text "12.0V  GND" at 4910,6185 h40 r90
  text "24.0V  GND" at 4900,5230 h40 r90
  text "3.3V  GND" at 4900,4235 h40 r90
  text "5.0V  GND" at 4895,3285 h40 r90
  text "For 3S battery" at 1632.59,2682.94 h40 r90
  text "12.0V  GND" at 4910,2245 h40 r90
  text "24.0V  GND" at 4900,1380 h40 r90

## Text inside footprints (layer, text, board x,y; h text height)
C1: Top Overlay "+" at 2859.53,7843.04 h59.06 r90
C2: Top Overlay "+" at 3930.47,8213.1 h59.06 r270
C3: Top Overlay "+" at 2834.53,7035.72 h59.06 r90
C4: Top Overlay "+" at 3955.47,7394.24 h59.06 r270
C5: Top Overlay "+" at 2839.53,6094.19 h59.06 r90
C6: Top Overlay "+" at 3960.47,6539.24 h59.06 r270
C7: Top Overlay "+" at 2765.47,5430.81 h59.06 r270
C8: Top Overlay "+" at 3495.47,5450.03 h59.06 r270
C9: Top Overlay "+" at 2804.53,4234.97 h59.06 r90
C10: Top Overlay "+" at 3984.53,4244.97 h59.06 r90
C11: Top Overlay "+" at 2819.53,3380.76 h59.06 r90
C12: Top Overlay "+" at 3999.53,3349.19 h59.06 r90
C13: Top Overlay "+" at 2740.47,2354.24 h59.06 r270
C14: Top Overlay "+" at 3460.47,2439.24 h59.06 r270
C15: Top Overlay "+" at 2735.47,1499.24 h59.06 r270
C16: Top Overlay "+" at 3564.53,1075.76 h59.06 r90